# EAGLE board Mototrol (EAGLE 7.7.0)
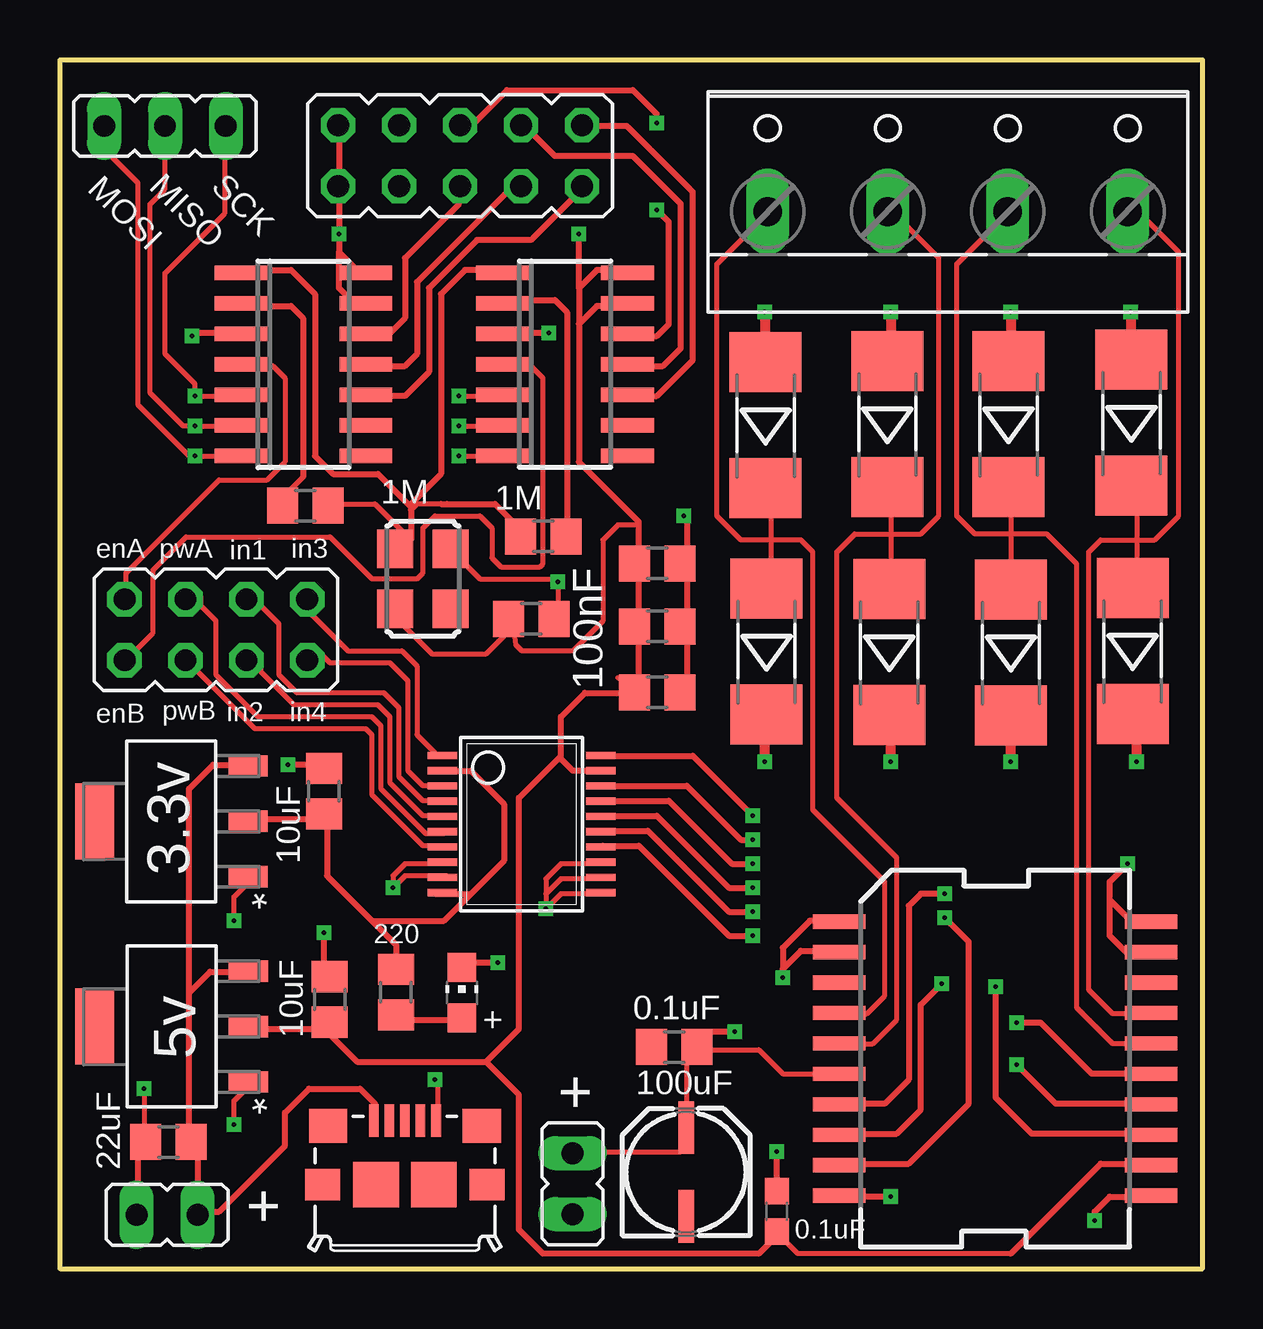
[diagram p0: board, top side]
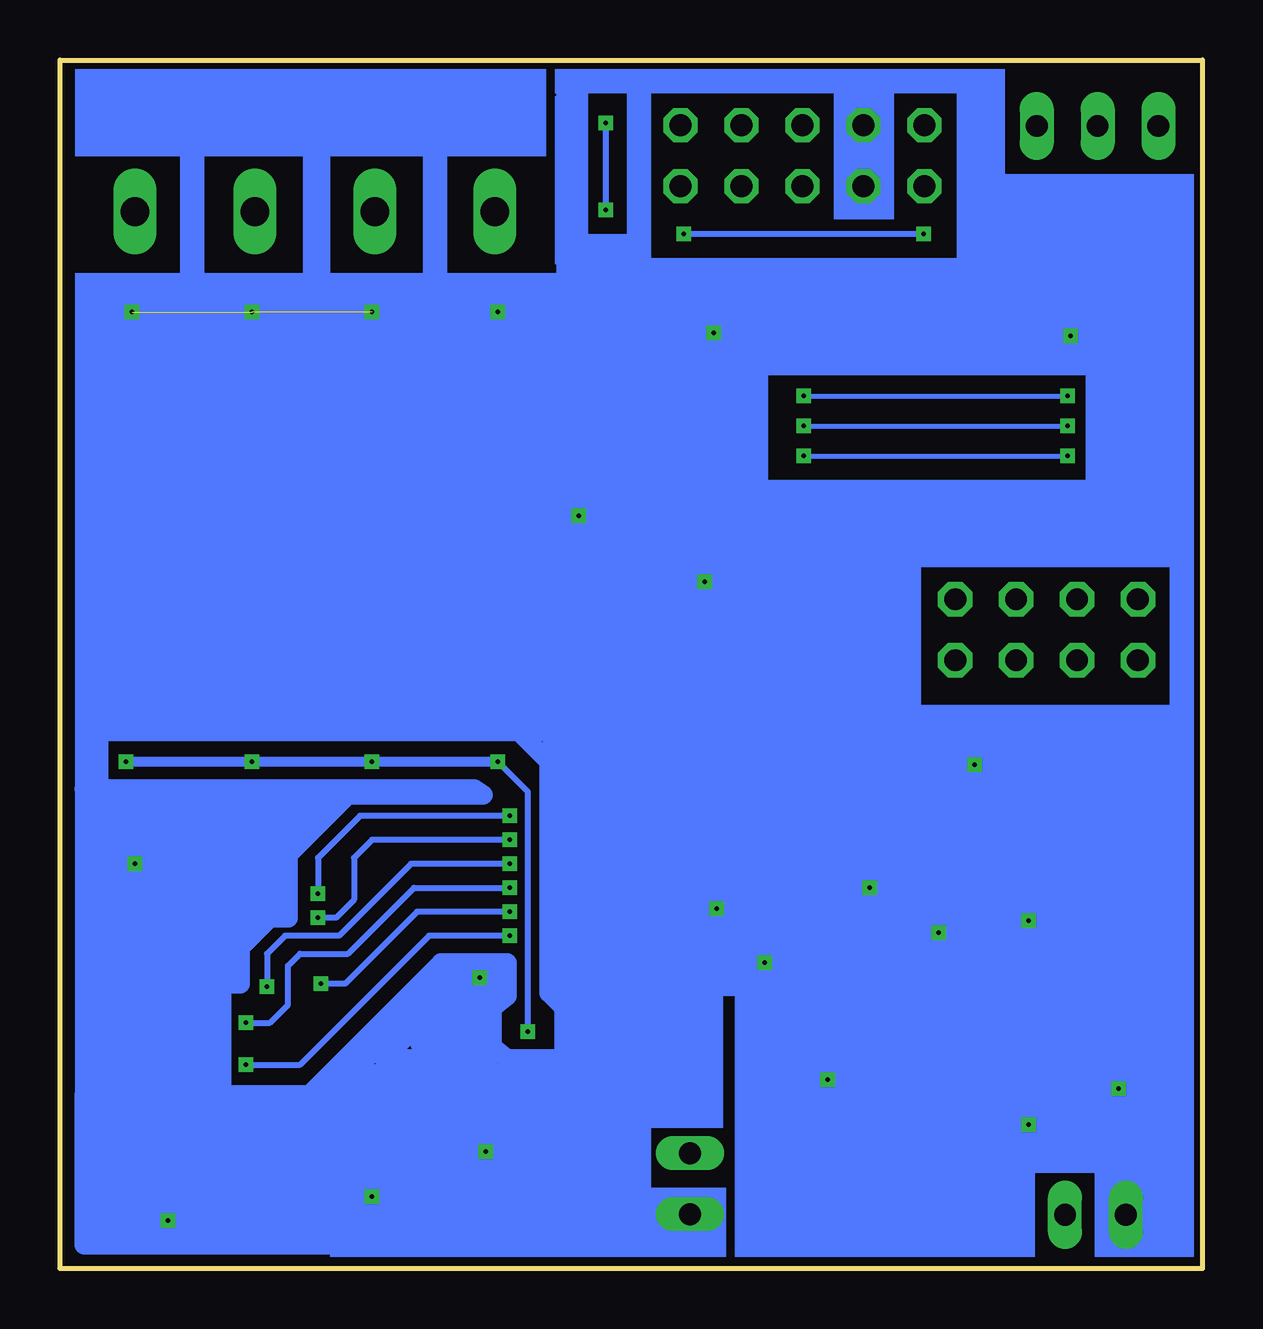
[diagram p1: board, bottom side, seen from below]

Size 47.62 x 50.38 mm. Coordinates in mm from the lower left corner, seen from the top.
Outline: 0,0 47.62,0 47.62,50.38 0,50.38 0,0
Copper layers (1*16): Top 0.035mm / dielectric 1.5mm / Bottom 0.035mm
Design rules "default": minimum track width 10mil, minimum drill 24mil, track to track 8mil, track to pad 8mil, pad to pad 8mil, via to via 8mil, smd to smd 8mil, copper to edge 40mil, drill to drill 8mil, minimum pad ring 10mil, minimum via ring 8mil, stop-mask expansion 4mil, vias tented up to drill 0mil, thermal gap 10mil

## Footprints (pad centres in the part's own frame; a part is rotated, then mirrored left to right if it is on the bottom)
JP2 = drill 0.914 long: 1 -2.54,0; 2 0,0; 3 2.54,0
R0805 = smd 1.3 x 1.5: 1 -0.95,0; 2 0.95,0
SO14 = smd 0.6 x 2.2: 1 -3.81,-2.6; 2 -2.54,-2.6; 3 -1.27,-2.6; 4 0,-2.6; 5 1.27,-2.6; 6 2.54,-2.6; 7 3.81,-2.6; 8 3.81,2.6; 9 2.54,2.6; 10 1.27,2.6; 11 0,2.6; 12 -1.27,2.6; 13 -2.54,2.6; 14 -3.81,2.6
CONN_USB_MICRO-B = smd 1.6 x 1.4: BODY@1 -3.2,2.45; BODY@2 3.2,2.45 | smd 1.45 x 1.3: BODY@3 3.425,0; BODY@6 -3.425,0 | smd 1.9 x 1.9: BODY@4 1.2,0; BODY@5 -1.2,0 | smd 0.4 x 1.35: P1 -1.3,2.675; P2 -0.65,2.675; P3 0,2.675; P4 0.65,2.675; P5 1.3,2.675
JP5Q = drill 0.914 octagon: 1 -5.08,-1.27; 2 -5.08,1.27; 3 -2.54,-1.27; 4 -2.54,1.27; 5 0,-1.27; 6 0,1.27; 7 2.54,-1.27; 8 2.54,1.27; 9 5.08,-1.27; 10 5.08,1.27
MELF-MLL41 = smd 2.5 x 3: A 2.625,0; C -2.625,0
POWERSO-20 = smd 0.6 x 2.2: 1 -5.715,-6.5; 2 -4.445,-6.5; 3 -3.175,-6.5; 4 -1.905,-6.5; 5 -0.635,-6.5; 6 0.635,-6.5; 7 1.905,-6.5; 8 3.175,-6.5; 9 4.445,-6.5; 10 5.715,-6.5; 11 5.715,6.5; 12 4.445,6.5; 13 3.175,6.5; 14 1.905,6.5; 15 0.635,6.5; 16 -0.635,6.5; 17 -1.905,6.5; 18 -3.175,6.5; 19 -4.445,6.5; 20 -5.715,6.5
SSOP20 = smd 0.305 x 1.245: 1 -2.857,-3.302; 2 -2.222,-3.302; 3 -1.587,-3.302; 4 -0.952,-3.302; 5 -0.317,-3.302; 6 0.318,-3.302; 7 0.953,-3.302; 8 1.588,-3.302; 9 2.223,-3.302; 10 2.858,-3.302; 11 2.858,3.302; 12 2.223,3.302; 13 1.588,3.302; 14 0.953,3.302; 15 0.318,3.302; 16 -0.317,3.302; 17 -0.952,3.302; 18 -1.587,3.302; 19 -2.222,3.302; 20 -2.857,3.302
JP1 = drill 0.914 long: 1 0,-1.27; 2 0,1.27
JP4Q = drill 0.914 octagon: 1 -3.81,-1.27; 2 -3.81,1.27; 3 -1.27,-1.27; 4 -1.27,1.27; 5 1.27,-1.27; 6 1.27,1.27; 7 3.81,-1.27; 8 3.81,1.27
PANASONIC_C = smd 2.2 x 0.65: + 1.9,-0.2; - -1.8,-0.2
W237-4 = drill 1.194 long: 1 -7.5,-1.27; 2 -2.5,-1.27; 3 2.5,-1.27; 4 7.5,-1.27
CHIP-LED0805 = smd 1.2 x 1.2: A 0,-1.05; C 0,1.05
ASF = smd 1.6 x 1.5: 1 -1.25,-1.15; 2 1.25,-1.15; 3 1.25,1.15; 4 -1.25,1.15
SOT230P700X180-4N = smd 1.626 x 0.889: 1 -3.2,2.311; 2 -3.2,0; 3 -3.2,-2.311 | smd 1.626 x 3.175: 4 3.2,0
C0603 = smd 1.1 x 1: 1 -0.85,0; 2 0.85,0

## Placement (x,y rotation side)
E$1  [JP2]  4.38,47.62 180 top
E$2  [R0805]  11,19.9 90 top
E$3  [SO14]  21.05,37.69 270 top
E$4  [SO14]  10.15,37.69 270 top
E$5  [CONN_USB_MICRO-B]  14.38,3.5 0 top
E$6  [R0805]  11.24,11.22 90 top
E$7  [JP5Q]  16.67,46.39 180 top
E$8  [MELF-MLL41]  34.56,25.7 90 top
E$9  [POWERSO-20]  38.98,8.75 270 top
E$10  [SSOP20]  19.24,18.52 270 top
E$11  [MELF-MLL41]  39.64,25.69 90 top
E$12  [MELF-MLL41]  29.41,35.15 90 top
E$13  [MELF-MLL41]  34.49,35.2 90 top
E$14  [MELF-MLL41]  44.71,25.75 90 top
E$15  [MELF-MLL41]  44.66,35.26 90 top
E$16  [MELF-MLL41]  39.54,35.2 90 top
E$17  [MELF-MLL41]  29.45,25.73 90 top
E$18  [JP1]  4.46,2.24 90 top
E$19  [JP4Q]  6.5,26.62 0 top
E$20  [PANASONIC_C]  25.9,3.98 90 top
E$21  [W237-4]  37,45.33 0 top
E$22  [R0805]  14,11.52 90 top
E$23  [CHIP-LED0805]  16.75,11.5 0 top
E$24  [ASF]  15.12,28.75 90 top
E$25  [SOT230P700X180-4N]  4.65,10.09 180 top
E$26  [C0603]  29.89,2.39 90 top
E$30  [SOT230P700X180-4N]  4.64,18.64 180 top
E$32  [JP1]  21.37,3.54 0 top
E$36  [R0805]  10.23,31.8 0 top
E$38  [R0805]  19.64,27.08 180 top
E$44  [R0805]  24.89,29.39 180 top
E$45  [R0805]  24.89,26.77 180 top
E$46  [R0805]  20.14,30.52 180 top
E$48  [R0805]  4.52,5.27 0 top
E$49  [R0805]  25.61,9.23 0 top
E$52  [R0805]  24.89,24.02 180 top

## Library data of the parts
E$1 E$18 E$19 E$32 = jumper
E$2 E$6 E$22 E$36 E$38 E$44-E$46 E$48 E$49 E$52 = eagle-ltspice
E$3 E$4 = analog-devices
E$5 = dp_devices
E$7 = jumper_single
E$8 E$11-E$17 = diode-1
E$9 = ref-packages
E$10 = texas
E$20 = SparkFun
E$21 = con-wago-500
E$23 = led
E$24 = crystal
E$25 E$30 = LD1117s_VoltageRegulator
E$26 = qfm-trx1-24g

## Tracks (layer width: path | path; a pad name or v marks a point on that pad's centre or on a via)
S$1
  Top 0.254: 7.75,18.75 10.75,18.75 11,19
S$2
  Top 0.2: 10.5,27.75 10.5,27.25 12,25.75 14.25,25.75 14.88,25.12 14.88,22.25 15.75,21.38
S$3  (via drill 0.2)
  Top 0.2: 8,7.75 7.25,7 v7.25,6 | 15.75,6.38 15.75,7.75 v15.62,7.88 | v3.5,7.5 3.5,5.38 3.38,5.25
S$4
  Top 0.2: 2.75,28 2.75,29 6.62,32.88 8.62,32.88 9.38,33.62 9.38,37.12 8.88,37.62 7.88,37.62
S$5
  Top 0.254: 7.5,10 10.5,10 11,10.5
S$6
  Top 0.2: 15.62,28.12 15.62,27.38
S$7  (via drill 0.2)
  Top 0.254: 11,21 v9.5,21
S$8
  Top 0.254: 5.88,2.38 6.62,2.38 9.38,5.12 9.38,6.5 10.38,7.5 12.5,7.5 13.12,6.88 13.12,5.75
S$9
  Top 0.254: 24.12,37.62 25.12,37.62 25.88,38.38 25.88,44.38 23.88,46.38 20.62,46.38 19.38,47.62
S$10
  Top 0.254: 21.62,45.12 21.62,44.88 19.62,42.88 17.38,42.88 15.38,40.88 15.38,37.38 14.38,36.38 12.62,36.38
S$11
  Top 0.254: 19.38,45.12 18.88,45.12 14.88,41.12 14.88,38.12 14.38,37.62 12.88,37.62
S$12
  Top 0.254: 16.62,45.12 16.62,44.38 14.38,42.12 14.38,39.62 13.62,38.88 13.12,38.88
S$13
  Top 0.254: 22.88,36.38 24.88,36.38 26.38,37.88 26.38,44.88 23.62,47.62 21.62,47.62
S$14
  Top 0.254: 14.12,10.38 17.12,10.38
S$15
  Top 0.254: 24.12,38.88 24.88,38.88 25.38,39.38 25.38,43.62 24.88,44.12
S$16
  Top 0.2: 9.12,31.75 9.12,32 10.12,33
  Top 0.254: 7.38,40.12 9.62,40.12 10.12,39.62 10.12,33
S$17
  Top 0.254: 18.62,40.38 20.62,40.38 21.12,39.88 21.12,30.62 20.62,30.12
S$18  (via drill 0.2)
  Top 0.2: 8,16.25 7.25,15.5 v7.25,14.5
S$19
  Top 0.2: 16.12,31.88 14.88,31.88 14.62,31.62 | 10.88,31.88 13.12,31.88 14.62,30.38
  Top 0.254: 7.62,41.62 9.62,41.62 10.62,40.62 10.62,33.88 11.38,33.12 13.25,33.12 14.62,31.75 | 19.12,30.88 18.12,31.88 16.12,31.88 15.88,31.88 | 18.88,41.62 16.88,41.62 15.88,40.62 15.88,33.12 14.62,31.88 14.62,31.75 | 14.62,31.75 14.62,31.62 14.62,30.38
S$20
  Top 0.2: 16.12,30.38 16.12,30.12 17.5,28.75 20.62,28.75 20.88,28.5
S$21  (via drill 0.2)
  Top 0.2: v16.62,33.88 18.38,33.88 | 7.12,33.88 v5.62,33.88 5.38,33.88 3.25,36 3.25,45.25 1.75,46.75
  Bottom 0.2: v16.62,33.88 v5.62,33.88
S$22
  Top 0.254: 5.75,2.38 5.75,4.75 5.38,5.12 5.38,11.5 | 5.38,11.5 6.25,12.38 8.12,12.38 | 5.38,11.5 5.38,20 6.38,21 7.75,21
S$23
  Top 0.254: 3.25,2.25 3.25,5 3.62,5.38
S$24  (via drill 0.2)
  Top 0.2: 22.75,16.88 20.88,16.88 20.25,16.25 20.25,15.62 | 20.25,15.62 v20.25,15 20.88,15.62 22.25,15.62 | 22.25,16.25 20.88,16.25 20.25,15.62
S$26
  Top 0.2: 19.12,16.5 19.12,12
  Top 0.254: 22.62,20.75 21.38,20.75 20.88,21.25 20.88,21.38 | 11,10 11.25,10 | 10.88,10 11,10 | 11,10 12.38,8.62 17.75,8.62 | 17.75,8.62 19.12,7.25 19.12,1.62 20.12,0.62 29.12,0.62 29.88,1.38 | 17.75,8.62 19.12,10 19.12,16.5 19.12,19.62 20.88,21.38 | 24,23.88 23.88,24 21.88,24 20.88,23 20.88,21.62 20.88,21.38
S$27
  Top 0.2: 39.62,0.62 30.75,0.62 29.88,1.5
  Top 0.254: 46.12,4.38 43.38,4.38 39.62,0.62
S$28  (via drill 0.2)
  Top 0.254: v28.12,9.88 27.12,9.88 26.38,9.12
  Top 0.406: v44.88,21.12 44.88,22.88 | v29.38,21.12 29.38,22.62
  Bottom 0.254: v28.12,9.88 28.12,19.88 v29.38,21.12
  Bottom 0.406: v29.38,21.12 v44.88,21.12
S$29
  Bottom 1.016: 42,48.12 42.12,48 42.12,40.88 42.38,40.62
S$30
  Top 0.2: 2.75,25.25 2.75,25.38 3.88,26.5 3.88,29.12 5.25,30.5 11.25,30.5 13,28.75 14.88,28.75 15.12,29 15.12,30.88 15.62,31.38 17.5,31.38 18,30.88 18,29.62 18.38,29.25 20,29.25 20.12,29.38 20.12,37.12 19.62,37.62 18.62,37.62
S$31  (via drill 0.2)
  Top 0.2: v16.62,35.12 18.38,35.12 | 7.62,35.12 v5.62,35.12 5.12,35.12 3.75,36.5 3.75,44.38 4.38,45 4.38,46.88
  Bottom 0.2: v16.62,35.12 v5.62,35.12
S$32
  Top 0.2: 14.12,27.12 14.12,27 15.5,25.62 17.75,25.62 18.75,26.62
S$33
  Top 0.2: 21.38,4.88 25.88,4.88 26.12,5.12 26.12,8.62 26.62,9.12 29.12,9.12 30.12,8.12 32.38,8.12
S$34
  Top 0.2: 29.62,32.62 29.62,28.12
S$35
  Top 0.2: 34.62,32.62 34.62,28.38 34.88,28.12
S$36
  Top 0.2: 39.62,32.62 39.62,28.12
S$37
  Top 0.2: 44.88,32.62 44.88,28.12 45.12,27.88
S$38
  Top 0.2: 32.38,10.62 33.62,10.62 34.38,11.38 34.38,16.12 31.38,19.12 31.38,29.88 30.88,30.38 28.38,30.38 27.38,31.38 27.38,41.88 29.38,43.88
S$39
  Top 0.2: 32.62,9.38 33.88,9.38 34.88,10.38 34.88,17.12 32.38,19.62 32.38,29.88 33.12,30.62 35.88,30.62 36.62,31.38 36.62,42.12 34.62,44.12
S$40
  Top 0.2: 45.88,10.62 43.88,10.62 42.88,11.62 42.88,29.88 43.38,30.38 45.62,30.38 46.62,31.38 46.62,42.38 44.88,44.12
S$41
  Top 0.2: 45.88,9.38 43.88,9.38 42.38,10.88 42.38,29.38 41.12,30.62 38.12,30.62 37.38,31.38 37.38,41.88 39.38,43.88
S$42  (via drill 0.2)  (2 unrouted)
  Top 0.406: v29.38,39.88 29.38,38.12 | v34.62,39.88 34.62,38.38 | v39.62,39.88 39.62,37.88 | v44.62,39.88 44.62,37.88
  Bottom 0.406: v29.38,39.88 v44.62,39.88
S$43  (via drill 0.2)
  Top 0.406: v34.62,21.12 34.62,22.62
S$44  (via drill 0.2)
  Top 0.406: v39.62,21.12 39.62,22.88
S$45  (via drill 0.2)
  Top 0.254: v34.62,3 32.5,3 32.38,3.12
S$46  (via drill 0.2)
  Top 0.254: 32.12,4.38 35.38,4.38 37.88,6.88 37.88,13.62 v36.88,14.62 | v28.88,17.88 28.38,17.88 26.12,20.12 22.62,20.12
  Bottom 0.254: v28.88,17.88 34.62,17.88 35.38,17.12 35.38,15.38 36.12,14.62 v36.88,14.62
S$47
  Top 0.2: 15.88,20.12 15.12,20.12 14.5,20.75 14.5,24.5 13.75,25.25 11.25,25.25 10.62,25.88
S$48
  Top 0.254: 26.12,31.38 26.12,23.88
S$49  (via drill 0.2)
  Top 0.254: v20.38,39 18.5,39 18.38,39.12
S$50  (via drill 0.2)
  Top 0.254: v28.88,18.88 27.38,20.38 27,20.75 26.38,21.38 22.38,21.38 | v36.88,15.62 35.88,15.62 35.38,15.12 35.38,7.88 34.38,6.88 31.88,6.88
  Bottom 0.254: v28.88,18.88 35.12,18.88 36.88,17.12 v36.88,15.62
S$51
  Top 0.2: 16,19.5 15.12,19.5 14.12,20.5 14.12,23.38 13.5,24 9.88,24 9.12,24.75 9.12,26.88 8.38,27.62 8.38,28.12 8.12,28.38
S$52  (via drill 0.2)
  Top 0.254: 22.62,19.5 25.38,19.5 28,16.88 v28.88,16.88 | 45.88,5.62 40.5,5.62 39,7.12 v39,11.75
  Bottom 0.254: v28.88,16.88 33,16.88 36,13.88 38.25,13.88 39,13.12 v39,11.75
S$53
  Top 0.2: 16.12,18.88 15.12,18.88 13.75,20.25 13.75,23 13.25,23.5 9.75,23.5 8.38,24.88 8.38,25.62 8.12,25.88
S$54
  Top 0.254: 12.38,40.12 11.62,40.88 11.62,42.38 | 11.62,42.38 11.62,47.62 11.5,47.62 | 11.62,42.38 12.62,41.38
S$55
  Top 0.2: 16,18.12 15.25,18.12 13.38,20 13.38,22.62 13,23 8.25,23 6.5,24.75 6.5,27 5.88,27.62 5.88,28 5.5,28.38
S$56
  Top 0.2: 15.75,17.62 15.12,17.62 13,19.75 13,22.25 12.75,22.5 8.12,22.5 5.75,24.88 5.75,25.62 5.5,25.88
S$57
  Bottom 1.016: 32,40.5 32,48.12
S$58
  Top 0.254: 15.88,20.75 17.12,20.75 18.5,19.38 18.5,17 17.12,15.62 | 11.12,18.88 11.12,16.38 13,14.5 | 15.62,15.62 17.12,15.62 | 13,14.5 16,14.5 17.12,15.62 | 13,14.5 14,13.5 14,12.38 13.88,12.25
S$70
  Bottom 0.813: 29,12.75 31.75,12.75 37.25,7.25 46.62,7.25 46.62,1 34.12,1
S$72  (via drill 0.2)
  Top 0.2: v20.75,28.62 20.75,27.62 20.25,27.12
S$75  (via drill 0.2)
  Top 0.254: 11,12.25 v11,14
S$76  (via drill 0.2)
  other vias: 26,31.38
S$78
  Top 0.2: 23.88,24.12 23.25,24.62
S$79  (via drill 0.2)
  Top 0.2: 16.12,16.88 14.38,16.88 13.88,16.38 v13.88,15.88 14.38,16.38 16.12,16.38
  Top 0.254: v18.25,12.75 17,12.75 16.75,12.5
S$84  (via drill 0.2)
  Top 0.2: v24.88,47.75 24.88,48.12
  Top 0.254: 16.62,47.62 17.12,47.62 18.62,49.12 23.88,49.12 24.75,48.25 24.88,48.12
  Bottom 0.254: v24.88,44.12 v24.88,47.75
S$109  (via drill 0.2)
  Top 0.2: v16.62,36.38 18.62,36.38 | v5.62,36.38 7.62,36.38 | v5.62,36.38 5.5,36.38 | v5.62,36.38 5.62,36.88 4.38,38.12 4.38,41.5 6.88,44 6.88,46.88
  Bottom 0.2: v16.62,36.38 v5.62,36.38
S$110
  Top 0.254: 7.25,7.75 8,7.75
S$120
  Bottom 0.406: 26.62,49.12 26.75,49 26.75,26.62 18.38,26.62
S$125
  Bottom 0.813: 25.25,4.75 25.5,4.5 25.5,6.5 27.12,8.12 35.5,8.12 | 35.75,8.12 35.5,8.12 | 35.5,8.12 31.5,12.12 29.62,12.12 29.5,12.25 29.5,11.88 30.25,11.12 30.25,9.25 29.75,8.75 34.12,8.75 31.38,11.5 30.5,11.5 | 30.38,11.5 30.5,11.5 | 30.5,11.5 32.62,9.38 31.88,9.38 30.75,10.5 30.75,9.38 30.88,9.25 31.88,9.25
S$126
  Bottom 0.813: 37.12,7.12 27.25,7.12 27.25,7.38 27.38,7.5 35.88,7.5 36,7.62
S$127
  Bottom 0.813: 41,11.88 40.12,11.88 40.12,13.38 38.88,14.62 38.12,14.62 38.12,17.25 35.62,19.75 30,19.75 30.38,20 40.88,20 | 46.62,20 40.88,20 | 40.88,20 40.25,19.5 40.25,14 40.38,13.88 40.12,13.88 38.75,15.25 38.75,17.38 36.5,19.62 39.88,19.62 39.88,15.12 | 39.88,15 39.88,15.12 | 39.88,15.12 39.38,15.62 39.38,19 39.25,19.12 37.75,19.12 | 37.62,19.12 37.75,19.12 | 37.75,19.12 39,17.88 39,18.62
S$128  (via drill 0.2)
  Top 0.254: 45.25,6.88 41.5,6.88 v39.88,8.5 | v28.88,13.88 27.88,13.88 24.12,17.62 22.62,17.62
  Bottom 0.254: v39.88,8.5 37.62,8.5 32.25,13.88 v28.88,13.88
S$129  (via drill 0.2)
  Top 0.254: 22.38,18.25 24.5,18.25 27.88,14.88 v28.88,14.88 | v36.75,11.88 35.88,11 35.88,6.62 34.88,5.62 32.62,5.62
  Bottom 0.254: v28.88,14.88 32.75,14.88 35.75,11.88 v36.75,11.88
S$130  (via drill 0.2)
  Top 0.254: 45.62,8.12 43,8.12 40.88,10.25 v39.88,10.25 | v28.88,15.88 27.88,15.88 24.88,18.88 22.62,18.88
  Bottom 0.254: v39.88,10.25 38.88,10.25 38.12,11 38.12,12.62 37.62,13.12 35.62,13.12 32.88,15.88 v28.88,15.88
S$132
  Bottom 0.813: 28.5,23.75 28.5,22.38 27.25,21.12 27.25,11.5 26.62,10.88 26.62,9 26.88,8.75 29,8.75 29.62,9.25 29.62,10.88 29,11.38 29,12.62
S$133
  Bottom 0.813: 26.62,3.75 26.38,3.5 24,3.5 23.88,3.62
S$134
  Bottom 0.813: 24.5,4.12 26,4.12
S$136
  Top 0.254: 32.38,14.5 31.25,14.5 30.12,13.38 30.12,12.5 | 30.12,12.12 30.12,12.5 | 30.12,12.5 30.88,13.25 32.38,13.25 32.5,13.12
S$137
  Bottom 0.813: 18.62,32.62 18.75,32.5
S$138
  Top 0.254: 45,13.12 44.5,13.12 43.75,13.88 43.75,15.38 | 45.88,14.38 44.75,14.38 43.75,15.38 | 43.75,15.38 43.75,15.88 43.75,16.12 44.5,16.88
S$139
  Bottom 1.016: 36.88,48.12 37,48 37,40.75 36.88,40.62 36.88,48 37,48.12
S$144  (via drill 0.2)
  Top 0.2: 24.12,31 23.25,31 22.62,30.38 22.62,27 21.38,25.75 19.25,25.75 19,26 18.88,27 18.38,27
  Top 0.254: 23.88,41.62 22.38,41.62 21.62,40.88 | 24.12,23.88 24.12,31 24.12,31.12 21.62,33.62 21.62,39.38 | 21.62,40.88 21.62,39.38 | 23.12,40.12 22.38,40.12 21.62,39.38 | 21.62,40.88 v21.62,43.12
  Bottom 0.254: v11.62,43.12 v21.62,43.12
S$145  (via drill 0.2)
  Top 0.254: 7.5,39 5.62,39 v5.5,38.88
S$149  (via drill 0.2)
  other vias: 44.5,16.88
S$150  (via drill 0.2)
  Top 0.254: 45.62,3 43.75,3 43.12,2.38 v43.12,2
S$151  (via drill 0.2)
  other vias: 30.12,12.12
S$152  (via drill 0.2)
  Top 0.254: 29.88,3.12 v29.88,4.88
(copper drawn outside any net)
  shapes: Bottom area x34

## Text on the board
tPlace: MOSI | MISO | SCK | 1M | 1M | in1 | enA | pwA | in3 | 100nF | in2 | in4 | enB | pwB | 3.3v | 10uF | 220 | 10uF | 5v | + | 0.1uF | 22uF | 100uF | + | + | 0.1uF